# Altium PCB STM 32 F4 Robusta V1.PcbDoc (part 4 of 7)
Units mm, origin at the board's own origin, x right, y up, seen from the top; angles counter-clockwise.
Board outline 287.78 x 230 mm, 2 copper layers (Top Layer, Bottom Layer); 54 components, 96 nets, 355 pads, 16 vias.
Unrouted connection lines stored in the file: 3.
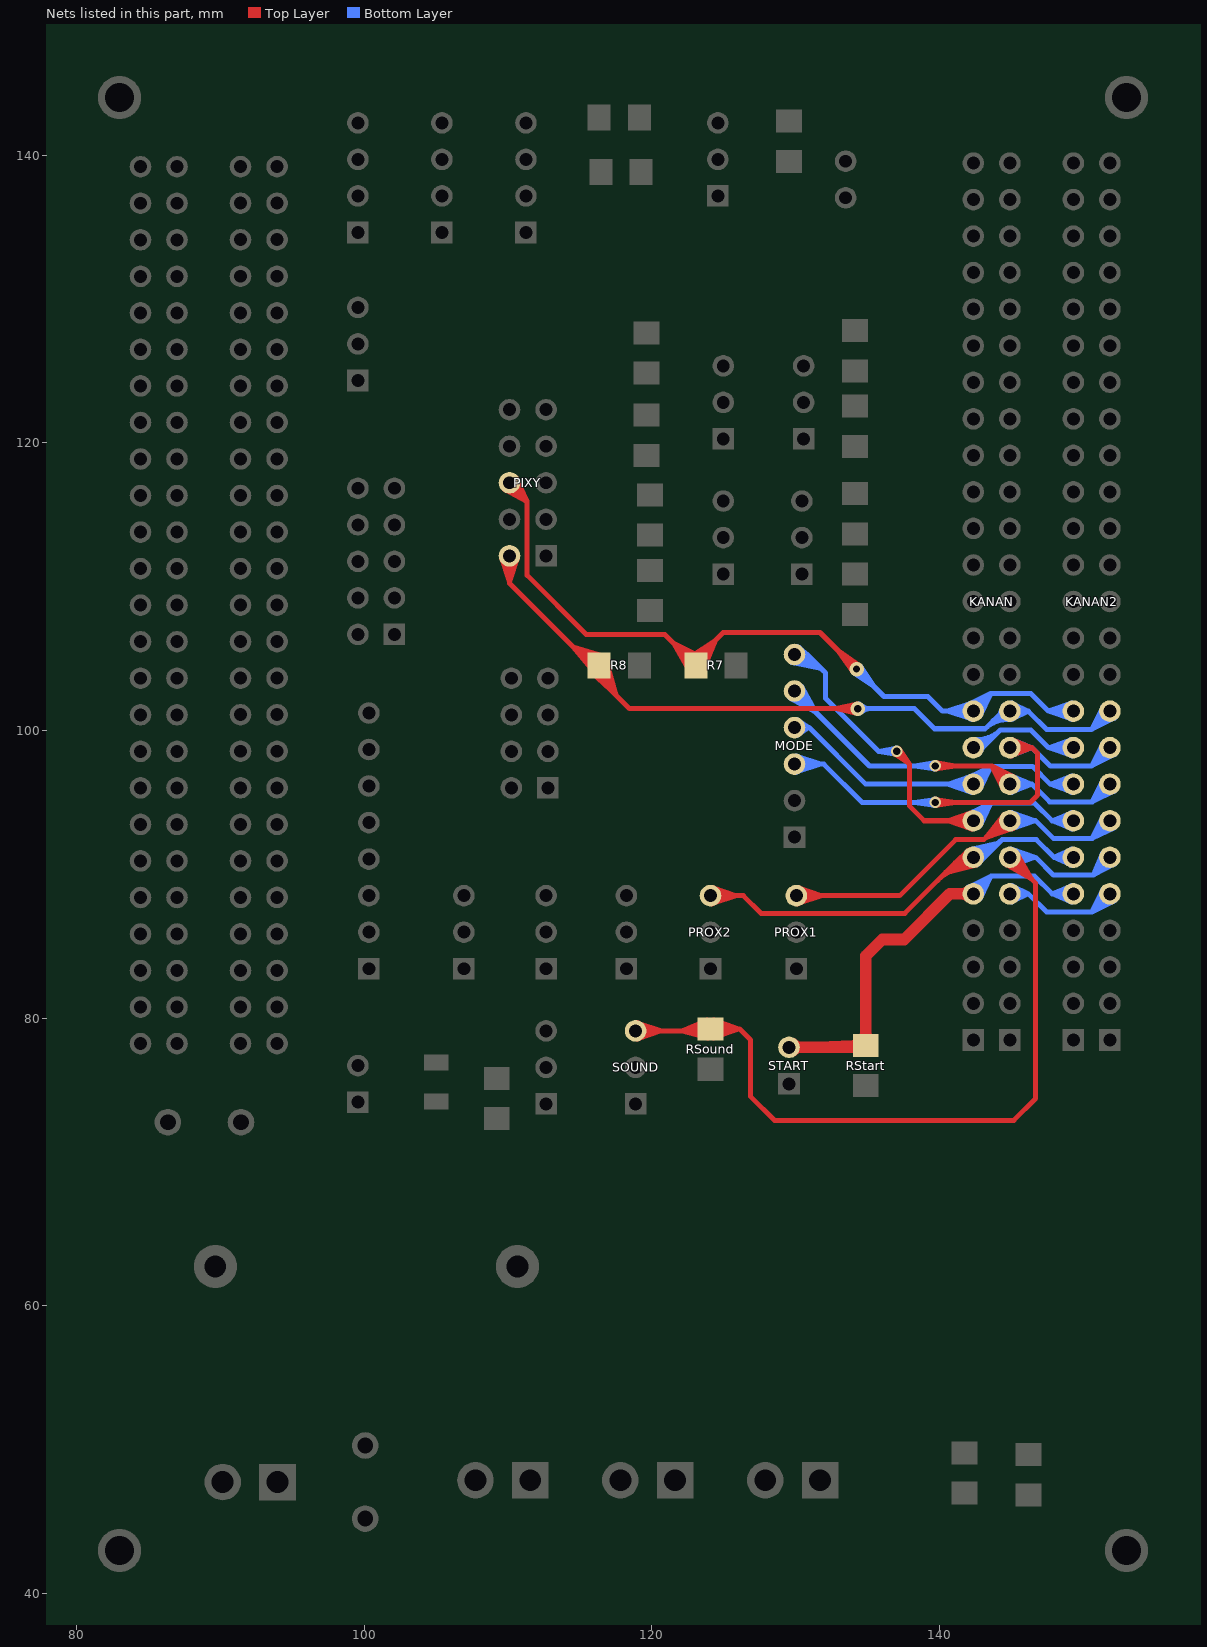
[diagram p4: the nets of this part, all layers, seen from the top]

## Via types
v1: diameter 1, hole 0.5, Top Layer to Bottom Layer, 13 vias
v2: diameter 0.8, hole 0.5, Top Layer to Bottom Layer, 3 vias

## Nets (pads, with @x,y where several pads share a name; then routed paths per layer and width w, separated by ;. In a path a pad name is that pad's centre, name@x,y a point inside that pad or via, vN(x,y) a via of type N, cw(c..) or ccw(c..) an arc to the next point about the centre after c; other vN are vias at no path point) (continued)
NetKANAN2_9: KANAN2.9 KANAN.9 | length 45.8
  Bottom Layer w0.35: KANAN.9@144.903,88.421 145.818,88.589 ; KANAN.9@144.903,88.871 145.818,88.703 ; KANAN.9@144.91,88.422 146.177,88.646 ; KANAN.9@144.91,88.87 146.177,88.646 ; KANAN.9@144.931,88.425 145.818,88.703 ; KANAN.9@144.931,88.867 145.818,88.589 ; KANAN.9@145.018,88.086 146.177,88.646 ; KANAN.9@145.018,89.206 146.177,88.646 ; KANAN.9@145.034,88.089 145.818,88.589 ; KANAN.9@145.034,89.203 145.818,88.703 ; KANAN.9@145.101,88.111 145.818,88.703 ; KANAN.9@145.101,89.181 145.818,88.589 ; KANAN.9@145.318,88.262 cw(c146.177,87.493) 146.177,88.646 ; KANAN.9@145.318,89.03 ccw(c146.177,89.799) 146.177,88.646 ; KANAN2.9@151.27,88.646 cw(c149.882,88.646) 150.863,87.664 cw(c151.845,86.683) KANAN2.9@151.845,88.071 ; KANAN2.9@151.329,88.899 151.151,87.885 ; KANAN2.9@151.354,88.946 151.084,87.952 ; KANAN2.9@151.379,88.982 150.575,87.376 ; KANAN2.9@151.663,88.779 151.151,87.885 ; KANAN2.9@151.978,88.464 151.084,87.952 ; KANAN2.9@152.099,88.13 151.084,87.952 ; KANAN2.9@152.145,88.155 151.151,87.885 ; KANAN2.9@152.181,88.18 150.575,87.376 ; KANAN.9@144.89,88.646 145.818,88.703 ; KANAN.9@144.89,88.646 145.818,88.589 ; KANAN.9@144.89,88.646 146.177,88.646 ; 146.177,88.646 147.447,87.376 150.575,87.376 ; 150.575,87.376 KANAN2.9@151.845,88.646 ; 150.575,87.376 151.676,88.795 151.084,87.952 ; 150.575,87.376 151.994,88.477 151.151,87.885 ; 150.575,87.376 KANAN2.9@151.845,88.646 ; 151.084,87.952 KANAN2.9@151.845,88.646 ; 151.151,87.885 KANAN2.9@151.845,88.646
NetKANAN2_10: KANAN2.10 KANAN.10 RStart.2 START.2 | length 79
  Top Layer w0.8: START.2@129.54,77.978 RStart.2@134.744,77.978 ; START.2@129.787,77.731 cw(c130.385,77.133) 130.385,77.978 cw(c130.385,78.823) START.2@129.787,78.225 ; 131.566,77.978 134.774,78.108 133.859,78.026 ; 133.494,77.978 ccw(c133.494,79.388) RStart.2@134.491,78.391 ; RStart.2@134.591,78.391 ccw(c133.908,79.074) 134.874,79.074 ccw(c135.84,79.074) RStart.2@135.157,78.391 ; RStart.2@134.874,78.108 134.874,84.328 136.017,85.471 137.541,85.471 140.716,88.646 ; KANAN.10@142.102,88.399 ccw(c141.505,87.801) 141.505,88.646 ccw(c141.505,89.491) KANAN.10@142.102,88.893 ; 140.716,88.646 KANAN.10@142.35,88.646 140.716,88.646
  Bottom Layer w0.35: KANAN.10@142.017,89.114 143.575,89.871 ; KANAN.10@142.05,89.137 143.044,89.407 ; KANAN.10@142.096,89.162 143.111,89.34 ; KANAN.10@142.217,88.828 143.111,89.34 ; KANAN.10@142.35,89.221 ccw(c142.35,90.609) 143.332,89.628 ccw(c144.313,88.646) KANAN.10@142.925,88.646 ; KANAN.10@142.532,88.513 143.044,89.407 ; KANAN.10@142.818,88.313 143.575,89.871 ; KANAN.10@142.841,88.346 143.111,89.34 ; KANAN.10@142.866,88.393 143.044,89.407 ; KANAN2.10@148.898,88.239 ccw(c147.917,87.258) 147.917,88.646 ccw(c147.917,90.034) KANAN2.10@148.898,89.053 ; KANAN2.10@149.119,88.102 148.276,88.693 ; KANAN2.10@149.119,89.19 148.276,88.599 ; KANAN2.10@149.17,88.087 148.276,88.599 ; KANAN2.10@149.17,89.205 148.276,88.693 ; KANAN2.10@149.193,88.082 147.828,88.646 ; KANAN2.10@149.193,89.21 147.828,88.646 ; KANAN2.10@149.27,88.424 148.276,88.693 ; KANAN2.10@149.27,88.868 148.276,88.599 ; KANAN2.10@149.288,88.422 147.828,88.646 ; KANAN2.10@149.288,88.87 147.828,88.646 ; KANAN2.10@149.291,88.421 148.276,88.599 ; KANAN2.10@149.291,88.871 148.276,88.693 ; KANAN.10@142.35,88.646 143.044,89.407 ; KANAN.10@142.35,88.646 143.111,89.34 ; KANAN.10@142.35,88.646 143.575,89.871 ; 143.044,89.407 142.201,88.815 143.575,89.871 ; 143.111,89.34 142.519,88.497 143.575,89.871 ; 143.575,89.871 146.603,89.871 147.828,88.646 ; 147.828,88.646 KANAN2.10@149.305,88.646 ; 147.828,88.646 KANAN2.10@149.305,88.646 ; 148.276,88.599 KANAN2.10@149.305,88.646 ; 148.276,88.693 KANAN2.10@149.305,88.646
NetKANAN2_11: KANAN2.11 KANAN.11 RSound.2 SOUND.3 | length 156.9
  Top Layer w0.35: SOUND.3@118.907,78.899 119.901,79.168 ; SOUND.3@118.907,79.343 119.901,79.074 ; SOUND.3@118.964,78.553 120.672,79.121 ; SOUND.3@118.964,79.689 120.672,79.121 ; SOUND.3@119.007,78.562 119.901,79.074 ; SOUND.3@119.007,79.68 119.901,79.168 ; SOUND.3@119.058,78.577 119.901,79.168 ; SOUND.3@119.058,79.665 119.901,79.074 ; SOUND.3@119.279,78.714 cw(c120.26,77.733) 120.26,79.121 cw(c120.26,80.509) SOUND.3@119.279,79.528 ; 122.156,79.121 ccw(c122.156,81.074) RSound.2@123.537,79.693 ; 122.784,79.121 cw(c122.784,78.056) RSound.2@123.537,78.809 ; 123.001,79.121 ccw(c123.001,80.229) RSound.2@123.785,79.445 ; RSound.2@123.668,79.793 123.06,79.085 ; RSound.2@123.802,79.85 122.662,79.188 ; RSound.2@123.831,79.858 122.122,79.121 ; RSound.2@123.86,78.637 122.662,79.188 ; RSound.2@123.878,78.634 123.06,79.085 ; RSound.2@123.891,79.511 123.06,79.085 ; RSound.2@123.917,78.629 122.122,79.121 ; RSound.2@123.937,79.523 122.662,79.188 ; RSound.2@123.94,79.523 122.122,79.121 ; RSound.2@123.949,79.121 SOUND.3@118.872,79.121 ; RSound.2@123.964,78.976 122.662,79.188 ; RSound.2@123.978,78.976 122.122,79.121 ; RSound.2@123.988,78.976 123.06,79.085 ; RSound.2@124.079,79.251 126.108,79.251 126.873,78.486 126.873,74.549 128.524,72.898 145.161,72.898 146.685,74.422 146.685,89.391 KANAN.11@144.89,91.186 ; RSound.2@124.225,78.98 125.297,79.302 ; RSound.2@124.225,79.522 125.297,79.2 ; RSound.2@124.285,78.635 126.029,79.251 ; RSound.2@124.285,79.867 126.029,79.251 ; RSound.2@124.326,78.643 125.297,79.2 ; RSound.2@124.326,79.859 125.297,79.302 ; RSound.2@124.381,78.659 125.297,79.302 ; RSound.2@124.381,79.843 125.297,79.2 ; RSound.2@124.621,78.809 cw(c125.688,77.742) 125.688,79.251 cw(c125.688,80.76) RSound.2@124.621,79.693 ; KANAN.11@144.543,90.728 146.382,89.694 ; KANAN.11@144.74,91.019 146.382,89.694 ; KANAN.11@145.057,91.336 146.382,89.694 ; KANAN.11@145.348,91.533 146.382,89.694 ; SOUND.3@118.872,79.121 119.901,79.168 ; SOUND.3@118.872,79.121 119.901,79.074 ; 119.901,79.074 118.886,78.896 120.672,79.121 ; 119.901,79.168 118.886,79.346 120.672,79.121 ; 122.122,79.121 RSound.2@123.979,79.251 ; 122.662,79.188 RSound.2@123.979,79.251 ; 123.06,79.085 RSound.2@123.979,79.251 ; RSound.2@124.179,79.251 126.029,79.251 ; RSound.2@124.179,79.251 125.297,79.302 ; RSound.2@124.179,79.251 125.297,79.2 ; 125.297,79.2 124.2,78.977 126.029,79.251 ; 125.297,79.302 124.2,79.525 126.029,79.251
  Bottom Layer w0.35: KANAN.11@144.89,91.186 146.685,91.186 ; KANAN.11@144.904,90.961 146.685,91.186 ; KANAN.11@144.904,91.411 146.685,91.186 ; KANAN.11@144.982,90.618 146.685,91.186 ; KANAN.11@144.982,91.754 146.685,91.186 ; 150.804,90.061 ccw(c149.679,91.186) KANAN2.11@151.27,91.186 ; 151.007,90.264 cw(c151.845,89.426) KANAN2.11@151.845,90.611 ; KANAN2.11@151.346,91.472 151.057,90.391 ; KANAN2.11@151.363,91.5 150.704,89.961 ; KANAN2.11@151.67,91.328 151.057,90.391 ; KANAN2.11@151.67,91.328 150.704,89.961 ; KANAN2.11@151.988,91.012 151.057,90.391 ; KANAN2.11@151.999,91.022 150.704,89.961 ; KANAN2.11@152.136,90.69 151.057,90.391 ; KANAN2.11@152.192,90.728 150.704,89.961 ; 146.685,91.186 147.91,89.961 150.704,89.961 ; 150.704,89.961 KANAN2.11@151.845,91.186 ; 150.704,89.961 151.845,91.102 KANAN2.11@151.845,91.186 ; 151.057,90.391 KANAN2.11@151.845,91.186
NetKANAN2_12: KANAN2.12 KANAN.12 PROX2.3 | length 150.6
  Top Layer w0.35: PROX2.3@124.114,88.297 125.108,88.566 ; PROX2.3@124.114,88.741 125.108,88.472 ; PROX2.3@124.171,87.951 125.879,88.519 ; PROX2.3@124.171,89.087 125.879,88.519 ; PROX2.3@124.214,87.96 125.108,88.472 ; PROX2.3@124.214,89.078 125.108,88.566 ; PROX2.3@124.265,87.975 125.108,88.566 ; PROX2.3@124.265,89.063 125.108,88.472 ; PROX2.3@124.486,88.112 cw(c125.467,87.131) 125.467,88.519 cw(c125.467,89.907) PROX2.3@124.486,88.926 ; 139.88,89.588 cw(c142.35,87.118) KANAN.12@142.35,90.611 ; 140.477,90.185 cw(c142.35,88.313) 142.35,90.961 141.448,91.069 ; 141.075,90.783 cw(c142.35,89.508) KANAN.12@142.35,91.311 ; KANAN.12@141.821,90.96 ccw(c141.478,90.812) 141.478,91.186 ; KANAN.12@141.821,91.412 cw(c141.478,91.56) 141.478,91.186 ; KANAN.12@141.988,91.633 140.607,90.145 ; KANAN.12@142.009,91.649 140.397,90.105 ; KANAN.12@142.019,91.656 141.026,90.606 ; KANAN.12@142.1,91.704 141.448,91.069 ; KANAN.12@142.224,91.372 140.607,90.145 ; KANAN.12@142.231,91.377 140.397,90.105 ; KANAN.12@142.24,90.622 141.448,91.069 ; KANAN.12@142.244,91.384 141.026,90.606 ; KANAN.12@142.294,91.404 141.448,91.069 ; KANAN.12@142.424,90.973 141.026,90.606 ; KANAN.12@142.449,90.984 140.397,90.105 ; KANAN.12@142.454,90.987 140.607,90.145 ; KANAN.12@142.471,90.624 141.026,90.606 ; KANAN.12@142.561,90.651 140.397,90.105 ; KANAN.12@142.572,90.656 140.607,90.145 ; PROX2.3@124.079,88.519 125.108,88.566 ; PROX2.3@124.079,88.519 125.108,88.472 ; PROX2.3@124.079,88.519 126.365,88.519 127.59,87.294 137.586,87.294 141.478,91.186 ; 125.108,88.472 124.093,88.294 125.879,88.519 ; 125.108,88.566 124.093,88.744 125.879,88.519 ; 140.397,90.105 KANAN.12@142.35,91.186 ; 140.607,90.145 KANAN.12@142.35,91.186 ; 141.026,90.606 KANAN.12@142.35,91.186 ; 141.448,91.069 KANAN.12@142.35,91.186 ; 141.478,91.186 KANAN.12@142.35,91.186 ; 141.478,91.186 142.321,91.409 141.478,91.186 ; 141.478,91.186 142.321,90.963 141.478,91.186 ; 141.478,91.186 142.16,91.729 141.478,91.186 ; 141.478,91.186 142.16,90.643 141.478,91.186 ; 141.478,91.186 KANAN.12@142.35,91.186 ; 141.478,91.186 KANAN.12@142.35,91.186
  Bottom Layer w0.35: KANAN.12@142.141,91.722 144.133,92.19 ; KANAN.12@142.167,91.731 143.607,91.912 ; KANAN.12@142.251,91.388 144.133,92.19 ; KANAN.12@142.253,91.389 143.607,91.912 ; KANAN.12@142.297,91.405 143.282,91.528 ; KANAN.12@142.317,91.76 143.282,91.528 ; KANAN.12@142.334,91.062 ccw(c142.492,92.265) 143.35,91.407 ; KANAN.12@142.379,91.409 ccw(c142.609,93.152) 143.852,91.909 ; KANAN.12@142.425,91.756 ccw(c142.725,94.039) 144.354,92.411 ; KANAN.12@142.451,90.985 143.282,91.528 ; KANAN.12@142.471,90.996 144.133,92.19 ; KANAN.12@142.477,91 143.607,91.912 ; KANAN.12@142.696,90.727 143.282,91.528 ; KANAN.12@142.7,90.73 144.133,92.19 ; KANAN.12@142.73,90.755 143.607,91.912 ; KANAN.12@142.899,91.017 cw(c143.129,90.946) 143.129,91.186 ; KANAN.12@142.899,91.355 ccw(c143.129,91.426) 143.129,91.186 ; KANAN2.12@148.89,90.788 ccw(c147.955,89.889) 147.955,91.186 ; KANAN2.12@148.89,91.584 cw(c147.955,92.483) 147.955,91.186 ; KANAN2.12@149.11,90.645 148.316,91.237 ; KANAN2.12@149.11,91.727 148.316,91.135 ; KANAN2.12@149.167,90.628 148.316,91.135 ; KANAN2.12@149.167,91.744 148.316,91.237 ; KANAN2.12@149.183,90.624 147.955,91.186 ; KANAN2.12@149.183,91.748 147.955,91.186 ; KANAN2.12@149.268,90.964 148.316,91.237 ; KANAN2.12@149.268,91.408 148.316,91.135 ; KANAN2.12@149.286,90.962 147.955,91.186 ; KANAN2.12@149.286,91.41 147.955,91.186 ; KANAN2.12@149.291,90.961 148.316,91.135 ; KANAN2.12@149.291,91.411 148.316,91.237 ; KANAN.12@142.35,91.186 143.282,91.528 ; KANAN.12@142.35,91.186 143.129,91.186 ; KANAN.12@142.35,91.186 144.133,92.19 ; KANAN.12@142.35,91.186 143.607,91.912 ; KANAN.12@142.35,91.186 143.129,91.186 ; 143.129,91.186 142.382,90.963 143.129,91.186 ; 143.129,91.186 142.382,91.409 143.129,91.186 ; 143.129,91.186 142.562,90.652 143.129,91.186 ; 143.129,91.186 142.562,91.72 143.129,91.186 ; 143.129,91.186 144.354,92.411 ; 144.354,92.411 146.73,92.411 147.955,91.186 ; 147.955,91.186 KANAN2.12@149.305,91.186 ; 147.955,91.186 KANAN2.12@149.305,91.186 ; 148.316,91.135 KANAN2.12@149.305,91.186 ; 148.316,91.237 KANAN2.12@149.305,91.186
NetKANAN2_13: KANAN2.13 KANAN.13 PROX1.3 | length 111.6
  Top Layer w0.35: PROX1.3@130.083,88.297 131.077,88.566 ; PROX1.3@130.083,88.741 131.077,88.472 ; PROX1.3@130.14,87.951 131.848,88.519 ; PROX1.3@130.14,89.087 131.848,88.519 ; PROX1.3@130.183,87.96 131.077,88.472 ; PROX1.3@130.183,89.078 131.077,88.566 ; PROX1.3@130.234,87.975 131.077,88.566 ; PROX1.3@130.234,89.063 131.077,88.472 ; PROX1.3@130.455,88.112 cw(c131.436,87.131) 131.436,88.519 cw(c131.436,89.907) PROX1.3@130.455,88.926 ; 143.676,93.003 cw(c144.878,91.802) KANAN.13@144.889,93.501 ; KANAN.13@144.475,94.124 143.621,92.82 ; KANAN.13@144.483,94.132 144.037,93.279 ; KANAN.13@144.496,94.145 143.229,92.556 ; KANAN.13@144.746,93.899 143.621,92.82 ; KANAN.13@144.75,93.902 143.229,92.556 ; KANAN.13@144.763,93.912 144.037,93.279 ; KANAN.13@144.886,93.151 ccw(c144.871,90.625) 143.084,92.411 ; KANAN.13@144.971,93.516 144.037,93.279 ; KANAN.13@144.993,93.16 144.037,93.279 ; KANAN.13@145.007,93.534 143.621,92.82 ; KANAN.13@145.009,93.535 143.229,92.556 ; KANAN.13@145.132,93.204 143.621,92.82 ; KANAN.13@145.151,93.214 143.229,92.556 ; PROX1.3@130.048,88.519 131.077,88.566 ; PROX1.3@130.048,88.519 131.077,88.472 ; PROX1.3@130.048,88.519 137.233,88.519 141.125,92.411 143.084,92.411 ; 131.077,88.472 130.062,88.294 131.848,88.519 ; 131.077,88.566 130.062,88.744 131.848,88.519 ; 143.084,92.411 144.399,93.726 KANAN.13@144.89,93.726 ; 143.229,92.556 KANAN.13@144.89,93.726 ; 143.621,92.82 KANAN.13@144.89,93.726 ; 144.037,93.279 KANAN.13@144.89,93.726
  Bottom Layer w0.35: KANAN.13@144.925,93.504 145.919,93.773 ; KANAN.13@144.925,93.948 145.919,93.679 ; KANAN.13@144.982,93.158 146.685,93.726 ; KANAN.13@144.982,94.294 146.685,93.726 ; KANAN.13@145.025,93.167 145.919,93.679 ; KANAN.13@145.025,94.285 145.919,93.773 ; KANAN.13@145.076,93.182 145.919,93.773 ; KANAN.13@145.076,94.27 145.919,93.679 ; KANAN.13@145.297,93.319 cw(c146.278,92.338) 146.278,93.726 cw(c146.278,95.114) KANAN.13@145.297,94.133 ; KANAN2.13@151.27,93.726 cw(c149.882,93.726) 150.863,92.744 cw(c151.845,91.763) KANAN2.13@151.845,93.151 ; KANAN2.13@151.329,93.979 151.151,92.965 ; KANAN2.13@151.354,94.026 151.084,93.032 ; KANAN2.13@151.377,94.059 150.62,92.501 ; KANAN2.13@151.663,93.859 151.151,92.965 ; KANAN2.13@151.978,93.544 151.084,93.032 ; KANAN2.13@152.099,93.21 151.084,93.032 ; KANAN2.13@152.145,93.235 151.151,92.965 ; KANAN2.13@152.178,93.258 150.62,92.501 ; KANAN.13@144.89,93.726 145.919,93.679 ; KANAN.13@144.89,93.726 145.919,93.773 ; KANAN.13@144.89,93.726 146.685,93.726 ; 145.919,93.679 144.904,93.501 146.685,93.726 ; 145.919,93.773 144.904,93.951 146.685,93.726 ; 146.685,93.726 147.91,92.501 150.62,92.501 ; 150.62,92.501 KANAN2.13@151.845,93.726 ; 150.62,92.501 151.676,93.874 151.084,93.032 ; 150.62,92.501 151.993,93.557 151.151,92.965 ; 150.62,92.501 KANAN2.13@151.845,93.726 ; 151.084,93.032 KANAN2.13@151.845,93.726 ; 151.151,92.965 KANAN2.13@151.845,93.726
NetKANAN2_14: KANAN2.14 KANAN.14 MODE.6 | length 135.1
  Top Layer w0.35: v2@136.889,98.379 137.922,97.663 ; v2@137.033,98.327 cw(c137.033,97.784) 137.417,98.168 cw(c137.801,98.552) v2@137.258,98.552 ; v2(137.033,98.552) 137.922,97.663 ; v2@137.206,98.696 137.922,97.663 ; KANAN.14@141.943,93.319 ccw(c140.962,92.338) 140.962,93.726 ccw(c140.962,95.114) KANAN.14@141.943,94.133 ; KANAN.14@142.164,93.182 141.321,93.773 ; KANAN.14@142.164,94.27 141.321,93.679 ; KANAN.14@142.215,93.167 141.321,93.679 ; KANAN.14@142.215,94.285 141.321,93.773 ; KANAN.14@142.258,93.158 140.55,93.726 ; KANAN.14@142.258,94.294 140.55,93.726 ; KANAN.14@142.315,93.504 141.321,93.773 ; KANAN.14@142.315,93.948 141.321,93.679 ; KANAN.14@142.336,93.501 141.321,93.679 ; KANAN.14@142.336,93.951 141.321,93.773 ; KANAN.14@142.336,93.501 140.55,93.726 ; KANAN.14@142.336,93.951 140.55,93.726 ; 137.922,97.663 137.922,94.742 138.938,93.726 KANAN.14@142.35,93.726 ; 141.321,93.679 KANAN.14@142.35,93.726 ; 141.321,93.773 KANAN.14@142.35,93.726
  Bottom Layer w0.35: MODE.6@129.729,104.741 131.77,104.323 ; MODE.6@129.747,104.735 131.267,104.553 ; MODE.6@129.829,105.078 131.267,104.553 ; MODE.6@129.828,105.078 131.77,104.323 ; MODE.6@129.871,105.064 130.945,104.935 ; MODE.6@129.887,104.709 130.945,104.935 ; MODE.6@129.904,105.407 cw(c130.094,104.021) 131.083,105.01 ; MODE.6@129.952,105.06 cw(c130.214,103.144) 131.581,104.512 ; MODE.6@129.999,104.713 cw(c130.334,102.267) 132.08,104.013 ; MODE.6@130.015,105.487 130.945,104.935 ; MODE.6@130.035,105.477 131.77,104.323 ; MODE.6@130.042,105.472 131.267,104.553 ; MODE.6@130.244,105.758 130.945,104.935 ; MODE.6@130.254,105.752 131.77,104.323 ; MODE.6@130.285,105.728 131.267,104.553 ; MODE.6@130.445,105.047 cw(c130.81,104.883) 130.81,105.283 ; MODE.6@130.445,105.519 ccw(c130.81,105.683) 130.81,105.283 ; v2@136.874,98.393 ccw(c136.49,98.009) 136.49,98.552 ccw(c136.49,99.095) v2@136.874,98.711 ; v2@136.96,98.339 136.63,98.571 ; v2@136.96,98.765 136.63,98.533 ; v2@136.98,98.333 136.63,98.533 ; v2@136.98,98.771 136.63,98.571 ; v2@137.013,98.328 135.763,98.552 ; v2@137.013,98.776 135.763,98.552 ; KANAN.14@142.017,94.194 143.575,94.951 ; KANAN.14@142.05,94.217 143.044,94.487 ; KANAN.14@142.096,94.242 143.111,94.42 ; KANAN.14@142.217,93.908 143.111,94.42 ; KANAN.14@142.35,94.301 ccw(c142.35,95.689) 143.332,94.708 ccw(c144.313,93.726) KANAN.14@142.925,93.726 ; KANAN.14@142.532,93.593 143.044,94.487 ; KANAN.14@142.818,93.393 143.575,94.951 ; KANAN.14@142.841,93.426 143.111,94.42 ; KANAN.14@142.866,93.473 143.044,94.487 ; KANAN2.14@148.898,93.319 ccw(c147.917,92.338) 147.917,93.726 ccw(c147.917,95.114) KANAN2.14@148.898,94.133 ; KANAN2.14@149.119,93.182 148.276,93.773 ; KANAN2.14@149.119,94.27 148.276,93.679 ; KANAN2.14@149.17,93.167 148.276,93.679 ; KANAN2.14@149.17,94.285 148.276,93.773 ; KANAN2.14@149.193,93.162 147.828,93.726 ; KANAN2.14@149.193,94.29 147.828,93.726 ; KANAN2.14@149.27,93.504 148.276,93.773 ; KANAN2.14@149.27,93.948 148.276,93.679 ; KANAN2.14@149.288,93.502 147.828,93.726 ; KANAN2.14@149.288,93.95 147.828,93.726 ; KANAN2.14@149.291,93.501 148.276,93.679 ; KANAN2.14@149.291,93.951 148.276,93.773 ; MODE.6@129.921,105.283 130.945,104.935 ; MODE.6@129.921,105.283 131.267,104.553 ; MODE.6@129.921,105.283 130.81,105.283 ; MODE.6@129.921,105.283 131.77,104.323 ; MODE.6@129.921,105.283 130.81,105.283 ; 130.81,105.283 129.949,105.06 130.81,105.283 ; 130.81,105.283 129.949,105.506 130.81,105.283 ; 130.81,105.283 130.107,104.739 130.81,105.283 ; 130.81,105.283 130.107,105.827 130.81,105.283 ; 130.81,105.283 132.08,104.013 ; 132.08,104.013 132.08,102.235 135.763,98.552 ; 135.763,98.552 v2(137.033,98.552) ; 135.763,98.552 v2(137.033,98.552) ; 136.63,98.533 v2(137.033,98.552) ; 136.63,98.571 v2(137.033,98.552) ; KANAN.14@142.35,93.726 143.044,94.487 ; KANAN.14@142.35,93.726 143.111,94.42 ; KANAN.14@142.35,93.726 143.575,94.951 ; 143.044,94.487 142.201,93.895 143.575,94.951 ; 143.111,94.42 142.519,93.577 143.575,94.951 ; 143.575,94.951 146.603,94.951 147.828,93.726 ; 147.828,93.726 KANAN2.14@149.305,93.726 ; 147.828,93.726 KANAN2.14@149.305,93.726 ; 148.276,93.679 KANAN2.14@149.305,93.726 ; 148.276,93.773 KANAN2.14@149.305,93.726
NetKANAN2_15: KANAN2.15 KANAN.15 MODE.5 | length 120.1
  Top Layer w0.35: v2@139.717,97.312 141.15,97.536 v2@139.717,97.76 ; v2@139.753,97.317 140.103,97.517 ; v2@139.753,97.755 140.103,97.555 ; v2@139.773,97.323 140.103,97.555 ; v2@139.773,97.749 140.103,97.517 ; v2@139.859,97.377 cw(c140.243,96.993) 140.243,97.536 cw(c140.243,98.079) v2@139.859,97.695 ; KANAN.15@144.315,96.266 ccw(c142.927,96.266) 143.908,97.248 ccw(c144.89,98.229) KANAN.15@144.89,96.841 ; KANAN.15@144.374,96.013 144.196,97.027 ; KANAN.15@144.399,95.966 144.129,96.96 ; KANAN.15@144.424,95.93 143.62,97.536 ; KANAN.15@144.708,96.133 144.196,97.027 ; KANAN.15@145.023,96.448 144.129,96.96 ; KANAN.15@145.143,96.782 144.129,96.96 ; KANAN.15@145.19,96.757 144.196,97.027 ; KANAN.15@145.226,96.732 143.62,97.536 ; v2(139.7,97.536) 140.103,97.555 ; v2(139.7,97.536) 140.103,97.517 ; v2(139.7,97.536) 143.62,97.536 ; 143.62,97.536 KANAN.15@144.89,96.266 ; 143.62,97.536 145.039,96.435 144.196,97.027 ; 143.62,97.536 144.721,96.117 144.129,96.96 ; 143.62,97.536 KANAN.15@144.89,96.266 ; 144.129,96.96 KANAN.15@144.89,96.266 ; 144.196,97.027 KANAN.15@144.89,96.266
  Bottom Layer w0.35: MODE.5@129.574,102.285 131.413,101.251 ; MODE.5@129.621,102.252 130.615,101.982 ; MODE.5@129.668,102.227 130.682,102.049 ; MODE.5@129.771,102.576 131.413,101.251 ; MODE.5@129.772,102.574 130.615,101.982 ; MODE.5@129.788,102.561 130.682,102.049 ; MODE.5@129.921,102.168 cw(c129.921,100.78) 130.903,101.761 cw(c131.884,102.743) MODE.5@130.496,102.743 ; MODE.5@130.088,102.893 131.413,101.251 ; MODE.5@130.09,102.892 130.682,102.049 ; MODE.5@130.103,102.876 130.615,101.982 ; MODE.5@130.379,103.09 131.413,101.251 ; MODE.5@130.412,103.043 130.682,102.049 ; MODE.5@130.437,102.996 130.615,101.982 ; v2@139.541,97.377 ccw(c139.157,96.993) 139.157,97.536 ccw(c139.157,98.079) v2@139.541,97.695 ; v2@139.627,97.323 139.297,97.555 ; v2@139.627,97.749 139.297,97.517 ; v2@139.647,97.317 139.297,97.517 ; v2@139.647,97.755 139.297,97.555 ; v2@139.683,97.312 138.25,97.536 v2@139.683,97.76 ; KANAN.15@144.904,96.041 145.919,96.219 ; KANAN.15@144.904,96.491 145.919,96.313 ; KANAN.15@144.906,96.042 146.431,96.266 ; KANAN.15@144.906,96.49 146.431,96.266 ; KANAN.15@144.925,96.044 145.919,96.313 ; KANAN.15@144.925,96.488 145.919,96.219 ; KANAN.15@144.997,95.701 146.431,96.266 ; KANAN.15@144.997,96.831 146.431,96.266 ; KANAN.15@145.025,95.707 145.919,96.219 ; KANAN.15@145.025,96.825 145.919,96.313 ; KANAN.15@145.076,95.722 145.919,96.313 ; KANAN.15@145.076,96.81 145.919,96.219 ; KANAN.15@145.297,95.859 cw(c146.278,94.878) 146.278,96.266 cw(c146.278,97.654) KANAN.15@145.297,96.673 ; KANAN2.15@151.27,96.266 cw(c149.882,96.266) 150.863,95.284 cw(c151.845,94.303) KANAN2.15@151.845,95.691 ; KANAN2.15@151.329,96.519 151.151,95.505 ; KANAN2.15@151.354,96.566 151.084,95.572 ; KANAN2.15@151.377,96.599 150.62,95.041 ; KANAN2.15@151.663,96.399 151.151,95.505 ; KANAN2.15@151.978,96.084 151.084,95.572 ; KANAN2.15@152.099,95.75 151.084,95.572 ; KANAN2.15@152.145,95.775 151.151,95.505 ; KANAN2.15@152.178,95.798 150.62,95.041 ; MODE.5@129.921,102.743 130.615,101.982 ; MODE.5@129.921,102.743 130.682,102.049 ; MODE.5@129.921,102.743 135.128,97.536 v2(139.7,97.536) ; 139.297,97.517 v2(139.7,97.536) ; 139.297,97.555 v2(139.7,97.536) ; KANAN.15@144.89,96.266 145.919,96.313 ; KANAN.15@144.89,96.266 145.919,96.219 ; KANAN.15@144.89,96.266 146.431,96.266 ; 146.431,96.266 147.656,95.041 150.62,95.041 ; 150.62,95.041 KANAN2.15@151.845,96.266 ; 150.62,95.041 151.676,96.414 151.084,95.572 ; 150.62,95.041 151.993,96.097 151.151,95.505 ; 150.62,95.041 KANAN2.15@151.845,96.266 ; 151.084,95.572 KANAN2.15@151.845,96.266 ; 151.151,95.505 KANAN2.15@151.845,96.266
NetKANAN2_16: KANAN2.16 KANAN.16 MODE.4 | length 86.9
  Bottom Layer w0.35: MODE.4@129.921,100.203 130.937,100.203 ; MODE.4@129.946,99.979 130.937,100.203 ; MODE.4@129.946,100.427 130.937,100.203 ; MODE.4@130.084,99.652 130.937,100.203 ; MODE.4@130.084,100.754 130.937,100.203 ; MODE.4@130.414,99.907 cw(c130.937,99.593) 130.937,100.203 ; MODE.4@130.414,100.499 ccw(c130.937,100.813) 130.937,100.203 ; KANAN.16@141.943,95.859 ccw(c140.962,94.878) 140.962,96.266 ccw(c140.962,97.654) KANAN.16@141.943,96.673 ; KANAN.16@142.017,96.734 143.575,97.491 ; KANAN.16@142.05,96.757 143.044,97.027 ; KANAN.16@142.096,96.782 143.111,96.96 ; KANAN.16@142.164,95.722 141.321,96.313 ; KANAN.16@142.164,96.81 141.321,96.219 ; KANAN.16@142.215,95.707 141.321,96.219 ; KANAN.16@142.215,96.825 141.321,96.313 ; KANAN.16@142.217,96.448 143.111,96.96 ; KANAN.16@142.258,95.698 140.55,96.266 ; KANAN.16@142.258,96.834 140.55,96.266 ; KANAN.16@142.315,96.044 141.321,96.313 ; KANAN.16@142.315,96.488 141.321,96.219 ; KANAN.16@142.336,96.041 141.321,96.219 ; KANAN.16@142.336,96.491 141.321,96.313 ; KANAN.16@142.336,96.041 140.55,96.266 ; KANAN.16@142.336,96.491 140.55,96.266 ; KANAN.16@142.35,96.841 ccw(c142.35,98.229) 143.332,97.248 ccw(c144.313,96.266) KANAN.16@142.925,96.266 ; KANAN.16@142.532,96.133 143.044,97.027 ; KANAN.16@142.818,95.933 143.575,97.491 ; KANAN.16@142.841,95.966 143.111,96.96 ; KANAN.16@142.866,96.013 143.044,97.027 ; KANAN2.16@148.898,95.859 ccw(c147.917,94.878) 147.917,96.266 ccw(c147.917,97.654) KANAN2.16@148.898,96.673 ; KANAN2.16@149.119,95.722 148.276,96.313 ; KANAN2.16@149.119,96.81 148.276,96.219 ; KANAN2.16@149.17,95.707 148.276,96.219 ; KANAN2.16@149.17,96.825 148.276,96.313 ; KANAN2.16@149.202,95.7 147.701,96.266 ; KANAN2.16@149.202,96.832 147.701,96.266 ; KANAN2.16@149.27,96.044 148.276,96.313 ; KANAN2.16@149.27,96.488 148.276,96.219 ; KANAN2.16@149.289,96.042 147.701,96.266 ; KANAN2.16@149.289,96.49 147.701,96.266 ; KANAN2.16@149.291,96.041 148.276,96.219 ; KANAN2.16@149.291,96.491 148.276,96.313 ; 130.937,100.203 134.874,96.266 KANAN.16@142.35,96.266 ; 141.321,96.219 KANAN.16@142.35,96.266 ; 141.321,96.313 KANAN.16@142.35,96.266 ; KANAN.16@142.35,96.266 143.044,97.027 ; KANAN.16@142.35,96.266 143.111,96.96 ; KANAN.16@142.35,96.266 143.575,97.491 ; 143.044,97.027 142.201,96.435 143.575,97.491 ; 143.111,96.96 142.519,96.117 143.575,97.491 ; 143.575,97.491 146.476,97.491 147.701,96.266 ; 147.701,96.266 KANAN2.16@149.305,96.266 ; 147.701,96.266 KANAN2.16@149.305,96.266 ; 148.276,96.219 KANAN2.16@149.305,96.266 ; 148.276,96.313 KANAN2.16@149.305,96.266
NetKANAN2_17: KANAN2.17 KANAN.17 MODE.3 | length 122
  Top Layer w0.35: v2@139.717,94.772 141.15,94.996 v2@139.717,95.22 ; v2@139.753,94.777 140.103,94.977 ; v2@139.753,95.215 140.103,95.015 ; v2@139.773,94.783 140.103,95.015 ; v2@139.773,95.209 140.103,94.977 ; v2@139.859,94.837 cw(c140.243,94.453) 140.243,94.996 cw(c140.243,95.539) v2@139.859,95.155 ; KANAN.17@144.904,98.581 145.919,98.759 ; KANAN.17@144.904,99.031 145.919,98.853 ; KANAN.17@144.906,98.582 146.431,98.806 ; KANAN.17@144.906,99.03 146.431,98.806 ; KANAN.17@144.925,98.584 145.919,98.853 ; KANAN.17@144.925,99.028 145.919,98.759 ; KANAN.17@144.997,98.241 146.431,98.806 ; KANAN.17@144.997,99.371 146.431,98.806 ; KANAN.17@145.025,98.247 145.919,98.759 ; KANAN.17@145.025,99.365 145.919,98.853 ; KANAN.17@145.076,98.262 145.919,98.853 ; KANAN.17@145.076,99.35 145.919,98.759 ; KANAN.17@145.297,98.399 cw(c146.278,97.418) 146.278,98.806 cw(c146.278,100.194) KANAN.17@145.297,99.213 ; v2(139.7,94.996) 140.103,95.015 ; v2(139.7,94.996) 140.103,94.977 ; v2(139.7,94.996) 146.304,94.996 146.812,95.504 146.812,98.425 146.431,98.806 ; KANAN.17@144.89,98.806 145.919,98.853 ; KANAN.17@144.89,98.806 145.919,98.759 ; KANAN.17@144.89,98.806 146.431,98.806
  Bottom Layer w0.35: MODE.3@129.956,97.441 130.95,97.71 ; MODE.3@129.956,97.885 130.95,97.616 ; MODE.3@130.013,97.095 131.721,97.663 ; MODE.3@130.013,98.231 131.721,97.663 ; MODE.3@130.056,97.104 130.95,97.616 ; MODE.3@130.056,98.222 130.95,97.71 ; MODE.3@130.107,97.119 130.95,97.71 ; MODE.3@130.107,98.207 130.95,97.616 ; MODE.3@130.328,97.256 cw(c131.309,96.275) 131.309,97.663 cw(c131.309,99.051) MODE.3@130.328,98.07 ; v2@139.541,94.837 ccw(c139.157,94.453) 139.157,94.996 ccw(c139.157,95.539) v2@139.541,95.155 ; v2@139.627,94.783 139.297,95.015 ; v2@139.627,95.209 139.297,94.977 ; v2@139.647,94.777 139.297,94.977 ; v2@139.647,95.215 139.297,95.015 ; v2@139.683,94.772 138.25,94.996 v2@139.683,95.22 ; KANAN.17@144.904,98.581 145.919,98.759 ; KANAN.17@144.904,99.031 145.919,98.853 ; KANAN.17@144.906,98.582 146.431,98.806 ; KANAN.17@144.906,99.03 146.431,98.806 ; KANAN.17@144.925,98.584 145.919,98.853 ; KANAN.17@144.925,99.028 145.919,98.759 ; KANAN.17@144.997,98.241 146.431,98.806 ; KANAN.17@144.997,99.371 146.431,98.806 ; KANAN.17@145.025,98.247 145.919,98.759 ; KANAN.17@145.025,99.365 145.919,98.853 ; KANAN.17@145.076,98.262 145.919,98.853 ; KANAN.17@145.076,99.35 145.919,98.759 ; KANAN.17@145.297,98.399 cw(c146.278,97.418) 146.278,98.806 cw(c146.278,100.194) KANAN.17@145.297,99.213 ; KANAN2.17@151.27,98.806 cw(c149.882,98.806) 150.863,97.824 cw(c151.845,96.843) KANAN2.17@151.845,98.231 ; KANAN2.17@151.329,99.059 151.151,98.045 ; KANAN2.17@151.354,99.106 151.084,98.112 ; KANAN2.17@151.379,99.142 150.575,97.536 ; KANAN2.17@151.663,98.939 151.151,98.045 ; KANAN2.17@151.978,98.624 151.084,98.112 ; KANAN2.17@152.099,98.29 151.084,98.112 ; KANAN2.17@152.145,98.315 151.151,98.045 ; KANAN2.17@152.181,98.34 150.575,97.536 ; MODE.3@129.921,97.663 130.95,97.71 ; MODE.3@129.921,97.663 130.95,97.616 ; MODE.3@129.921,97.663 131.953,97.663 134.62,94.996 v2(139.7,94.996) ; 130.95,97.616 129.935,97.438 131.721,97.663 ; 130.95,97.71 129.935,97.888 131.721,97.663 ; 139.297,94.977 v2(139.7,94.996) ; 139.297,95.015 v2(139.7,94.996) ; KANAN.17@144.89,98.806 145.919,98.853 ; KANAN.17@144.89,98.806 145.919,98.759 ; KANAN.17@144.89,98.806 146.431,98.806 ; 146.431,98.806 147.701,97.536 150.575,97.536 ; 150.575,97.536 KANAN2.17@151.845,98.806 ; 150.575,97.536 151.676,98.955 151.084,98.112 ; 150.575,97.536 151.994,98.637 151.151,98.045 ; 150.575,97.536 KANAN2.17@151.845,98.806 ; 151.084,98.112 KANAN2.17@151.845,98.806 ; 151.151,98.045 KANAN2.17@151.845,98.806
NetKANAN2_18: KANAN2.18 KANAN.18 | length 38.2
  Bottom Layer w0.35: KANAN.18@142.288,99.022 143.217,99.17 ; KANAN.18@142.3,99.379 143.217,99.17 ; KANAN.18@142.338,98.682 ccw(c142.439,99.723) 143.179,98.983 ; KANAN.18@142.372,99.03 ccw(c142.532,100.678) 143.703,99.507 ; KANAN.18@142.406,99.378 ccw(c142.626,101.632) 144.227,100.031 ; KANAN.18@142.461,98.61 143.217,99.17 ; KANAN.18@142.724,98.369 143.217,99.17 ; KANAN2.18@148.898,98.399 ccw(c147.917,97.418) 147.917,98.806 ccw(c147.917,100.194) KANAN2.18@148.898,99.213 ; KANAN2.18@149.119,98.262 148.276,98.853 ; KANAN2.18@149.119,99.35 148.276,98.759 ; KANAN2.18@149.17,98.247 148.276,98.759 ; KANAN2.18@149.17,99.365 148.276,98.853 ; KANAN2.18@149.21,98.239 147.574,98.806 ; KANAN2.18@149.21,99.373 147.574,98.806 ; KANAN2.18@149.27,98.584 148.276,98.853 ; KANAN2.18@149.27,99.028 148.276,98.759 ; KANAN2.18@149.29,98.581 147.574,98.806 ; KANAN2.18@149.29,99.031 147.574,98.806 ; KANAN2.18@149.291,98.581 148.276,98.759 ; KANAN2.18@149.291,99.031 148.276,98.853 ; 143.217,99.17 KANAN.18@142.35,98.806 143.002,98.806 144.227,100.031 ; 144.227,100.031 146.349,100.031 147.574,98.806 ; 147.574,98.806 KANAN2.18@149.305,98.806 ; 147.574,98.806 KANAN2.18@149.305,98.806 ; 148.276,98.759 KANAN2.18@149.305,98.806 ; 148.276,98.853 KANAN2.18@149.305,98.806
NetKANAN2_19: KANAN2.19 KANAN.19 PIXY.9 R8.1 | length 149.9
  Top Layer w0.35: PIXY.9@109.541,112.049 110.109,110.341 ; PIXY.9@109.55,112.006 110.062,111.112 ; PIXY.9@109.565,111.955 110.156,111.112 ; PIXY.9@109.702,111.734 cw(c108.721,110.753) 110.109,110.753 cw(c111.497,110.753) PIXY.9@110.516,111.734 ; PIXY.9@109.887,112.106 110.156,111.112 ; PIXY.9@110.331,112.106 110.062,111.112 ; PIXY.9@110.653,111.955 110.062,111.112 ; PIXY.9@110.668,112.006 110.156,111.112 ; PIXY.9@110.677,112.049 110.109,110.341 ; R8.1@115.842,104.029 117.52,102.444 ; R8.1@115.912,104.156 114.521,105.824 ; R8.1@116.102,104.265 117.52,102.444 ; R8.1@116.162,104.402 114.521,105.824 ; R8.1@116.329,104.421 117.52,102.444 ; R8.1@116.329,104.621 114.521,105.824 ; R8.1@116.467,104.859 114.521,105.824 ; R8.1@116.573,104.549 117.52,102.444 ; R8.1@116.597,105.186 114.521,105.824 ; R8.1@116.903,104.668 117.52,102.444 ; v1@134.091,101.288 ccw(c133.536,100.733) 133.536,101.518 ccw(c133.536,102.303) v1@134.091,101.748 ; v1@134.216,101.21 133.739,101.545 ; v1@134.216,101.826 133.739,101.491 ; v1@134.245,101.202 133.739,101.491 ; v1@134.245,101.834 133.739,101.545 ; v1@134.287,101.195 132.771,101.518 v1@134.287,101.841 ; 110.062,111.112 PIXY.9@110.109,112.141 ; 110.062,111.112 109.884,112.127 110.109,110.341 ; 110.109,110.341 110.334,112.127 110.156,111.112 ; PIXY.9@110.109,112.141 110.156,111.112 ; PIXY.9@110.109,112.141 110.109,110.236 115.824,104.521 R8.1@116.329,104.521 116.329,103.635 118.446,101.518 v1(134.321,101.518) ; 133.739,101.491 v1(134.321,101.518) ; 133.739,101.545 v1(134.321,101.518)
  Bottom Layer w0.35: v1@134.397,101.202 134.903,101.491 ; v1@134.397,101.834 134.903,101.545 ; v1@134.426,101.21 134.903,101.545 ; v1@134.426,101.826 134.903,101.491 ; v1@134.551,101.288 cw(c135.106,100.733) 135.106,101.518 cw(c135.106,102.303) v1@134.551,101.748 ; 143.732,100.679 cw(c144.804,99.607) KANAN.19@144.879,101.121 ; KANAN.19@144.477,101.746 144.112,100.956 ; KANAN.19@144.764,101.532 144.112,100.956 ; KANAN.19@144.862,100.772 ccw(c144.751,98.544) 143.174,100.121 ; KANAN.19@144.903,101.121 145.818,101.289 ; KANAN.19@144.903,101.571 145.818,101.403 ; KANAN.19@144.91,101.122 146.177,101.346 ; KANAN.19@144.91,101.57 146.177,101.346 ; KANAN.19@144.931,101.125 145.818,101.403 ; KANAN.19@144.931,101.567 145.818,101.289 ; KANAN.19@144.963,100.776 144.112,100.956 ; KANAN.19@144.964,101.134 144.112,100.956 ; KANAN.19@145.018,100.786 146.177,101.346 ; KANAN.19@145.018,101.906 146.177,101.346 ; KANAN.19@145.034,100.789 145.818,101.289 ; KANAN.19@145.034,101.903 145.818,101.403 ; KANAN.19@145.101,100.811 145.818,101.403 ; KANAN.19@145.101,101.881 145.818,101.289 ; KANAN.19@145.318,100.962 cw(c146.177,100.193) 146.177,101.346 ; KANAN.19@145.318,101.73 ccw(c146.177,102.499) 146.177,101.346 ; KANAN2.19@151.27,101.346 cw(c149.882,101.346) 150.863,100.364 cw(c151.845,99.383) KANAN2.19@151.845,100.771 ; KANAN2.19@151.329,101.599 151.151,100.585 ; KANAN2.19@151.354,101.646 151.084,100.652 ; KANAN2.19@151.379,101.682 150.575,100.076 ; KANAN2.19@151.663,101.479 151.151,100.585 ; KANAN2.19@151.978,101.164 151.084,100.652 ; KANAN2.19@152.099,100.83 151.084,100.652 ; KANAN2.19@152.145,100.855 151.151,100.585 ; KANAN2.19@152.181,100.88 150.575,100.076 ; v1(134.321,101.518) 134.903,101.545 ; v1(134.321,101.518) 134.903,101.491 ; v1(134.321,101.518) 138.258,101.518 139.655,100.121 143.174,100.121 ; 143.174,100.121 144.399,101.346 KANAN.19@144.89,101.346 ; 144.112,100.956 KANAN.19@144.89,101.346 ; KANAN.19@144.89,101.346 145.818,101.403 ; KANAN.19@144.89,101.346 145.818,101.289 ; KANAN.19@144.89,101.346 146.177,101.346 ; 146.177,101.346 147.447,100.076 150.575,100.076 ; 150.575,100.076 KANAN2.19@151.845,101.346 ; 150.575,100.076 151.676,101.495 151.084,100.652 ; 150.575,100.076 151.994,101.177 151.151,100.585 ; 150.575,100.076 KANAN2.19@151.845,101.346 ; 151.084,100.652 KANAN2.19@151.845,101.346 ; 151.151,100.585 KANAN2.19@151.845,101.346
NetKANAN2_20: KANAN2.20 KANAN.20 PIXY.5 R7.1 | length 177.2
  Top Layer w0.35: PIXY.5@109.756,116.767 111.334,115.906 ; PIXY.5@109.816,116.726 110.899,116.418 ; PIXY.5@109.954,117.058 111.334,115.906 ; PIXY.5@109.965,117.048 110.899,116.418 ; PIXY.5@110.109,116.646 cw(c110.109,115.475) 110.937,116.303 ; PIXY.5@110.283,117.364 111.334,115.906 ; PIXY.5@110.284,117.362 110.899,116.418 ; PIXY.5@110.587,117.541 111.334,115.906 ; PIXY.5@110.608,117.506 110.899,116.418 ; PIXY.5@110.684,117.221 ccw(c112.289,117.221) 111.154,116.086 ; 121.822,105.759 ccw(c123.06,106.996) 123.06,105.246 ccw(c123.06,106.084) 123.652,105.491 ; 122.064,105.517 cw(c121.168,104.621) R7.1@122.435,104.621 ; R7.1@122.42,105.161 ccw(c123.06,105.801) R7.1@123.06,104.896 ; R7.1@122.523,104.301 122.185,105.48 ; R7.1@122.57,104.233 121.518,106.063 ; R7.1@122.642,105.086 124.449,106.288 ; R7.1@122.682,105.118 123.977,105.711 ; R7.1@122.847,104.448 122.185,105.48 ; R7.1@122.859,104.433 121.518,106.063 ; R7.1@122.86,104.81 124.449,106.288 ; R7.1@122.868,104.818 123.977,105.711 ; R7.1@123.229,104.838 122.185,105.48 ; R7.1@123.234,104.834 121.518,106.063 ; R7.1@123.282,104.459 124.449,106.288 ; R7.1@123.287,104.465 123.977,105.711 ; R7.1@123.335,104.621 cw(c124.67,104.621) 123.726,105.565 ; R7.1@123.37,105.164 122.185,105.48 ; R7.1@123.415,105.136 121.518,106.063 ; R7.1@123.593,104.294 124.449,106.288 ; R7.1@123.615,104.333 123.977,105.711 ; R7.1@123.685,104.621 cw(c125.865,104.621) 124.324,106.163 ; v1@133.989,104.059 132.997,105.509 v1@134.447,104.517 ; v1(134.239,104.267) 131.699,106.807 124.968,106.807 123.06,104.899 R7.1@123.06,104.521 120.901,106.68 115.443,106.68 111.334,110.789 111.334,115.906 ; PIXY.5@110.109,117.221 111.334,115.906 ; PIXY.5@110.109,117.221 110.899,116.418 ; PIXY.5@110.109,117.221 110.109,117.131 111.334,115.906 ; 121.518,106.063 R7.1@123.06,104.621 ; 122.185,105.48 R7.1@123.06,104.621 ; R7.1@123.06,104.621 124.449,106.288 ; R7.1@123.06,104.621 123.977,105.711
  Bottom Layer w0.35: v1@134.031,104.017 135.481,103.025 v1@134.489,104.475 ; v1(134.239,104.267) 136.144,102.362 139.192,102.362 140.208,101.346 KANAN.20@142.35,101.346 ; KANAN.20@141.943,100.939 ccw(c140.962,99.958) 140.962,101.346 ccw(c140.962,102.734) KANAN.20@141.943,101.753 ; KANAN.20@142.017,101.814 143.575,102.571 ; KANAN.20@142.05,101.837 143.044,102.107 ; KANAN.20@142.096,101.862 143.111,102.04 ; KANAN.20@142.164,100.802 141.321,101.393 ; KANAN.20@142.164,101.89 141.321,101.299 ; KANAN.20@142.215,100.787 141.321,101.299 ; KANAN.20@142.215,101.905 141.321,101.393 ; KANAN.20@142.217,101.528 143.111,102.04 ; KANAN.20@142.258,100.778 140.55,101.346 ; KANAN.20@142.258,101.914 140.55,101.346 ; KANAN.20@142.315,101.124 141.321,101.393 ; KANAN.20@142.315,101.568 141.321,101.299 ; KANAN.20@142.336,101.121 141.321,101.299 ; KANAN.20@142.336,101.571 141.321,101.393 ; KANAN.20@142.336,101.121 140.55,101.346 ; KANAN.20@142.336,101.571 140.55,101.346 ; KANAN.20@142.35,101.921 ccw(c142.35,103.309) 143.332,102.328 ccw(c144.313,101.346) KANAN.20@142.925,101.346 ; KANAN.20@142.532,101.213 143.044,102.107 ; KANAN.20@142.818,101.013 143.575,102.571 ; KANAN.20@142.841,101.046 143.111,102.04 ; KANAN.20@142.866,101.093 143.044,102.107 ; KANAN2.20@148.898,100.939 ccw(c147.917,99.958) 147.917,101.346 ccw(c147.917,102.734) KANAN2.20@148.898,101.753 ; KANAN2.20@149.119,100.802 148.276,101.393 ; KANAN2.20@149.119,101.89 148.276,101.299 ; KANAN2.20@149.17,100.787 148.276,101.299 ; KANAN2.20@149.17,101.905 148.276,101.393 ; KANAN2.20@149.21,100.779 147.574,101.346 ; KANAN2.20@149.21,101.913 147.574,101.346 ; KANAN2.20@149.27,101.124 148.276,101.393 ; KANAN2.20@149.27,101.568 148.276,101.299 ; KANAN2.20@149.29,101.121 147.574,101.346 ; KANAN2.20@149.29,101.571 147.574,101.346 ; KANAN2.20@149.291,101.121 148.276,101.299 ; KANAN2.20@149.291,101.571 148.276,101.393 ; 141.321,101.299 KANAN.20@142.35,101.346 ; 141.321,101.393 KANAN.20@142.35,101.346 ; KANAN.20@142.35,101.346 143.044,102.107 ; KANAN.20@142.35,101.346 143.111,102.04 ; KANAN.20@142.35,101.346 143.575,102.571 ; 143.044,102.107 142.201,101.515 143.575,102.571 ; 143.111,102.04 142.519,101.197 143.575,102.571 ; 143.575,102.571 146.349,102.571 147.574,101.346 ; 147.574,101.346 KANAN2.20@149.305,101.346 ; 147.574,101.346 KANAN2.20@149.305,101.346 ; 148.276,101.299 KANAN2.20@149.305,101.346 ; 148.276,101.393 KANAN2.20@149.305,101.346